# EAGLE board Driver (EAGLE 9.6.2)
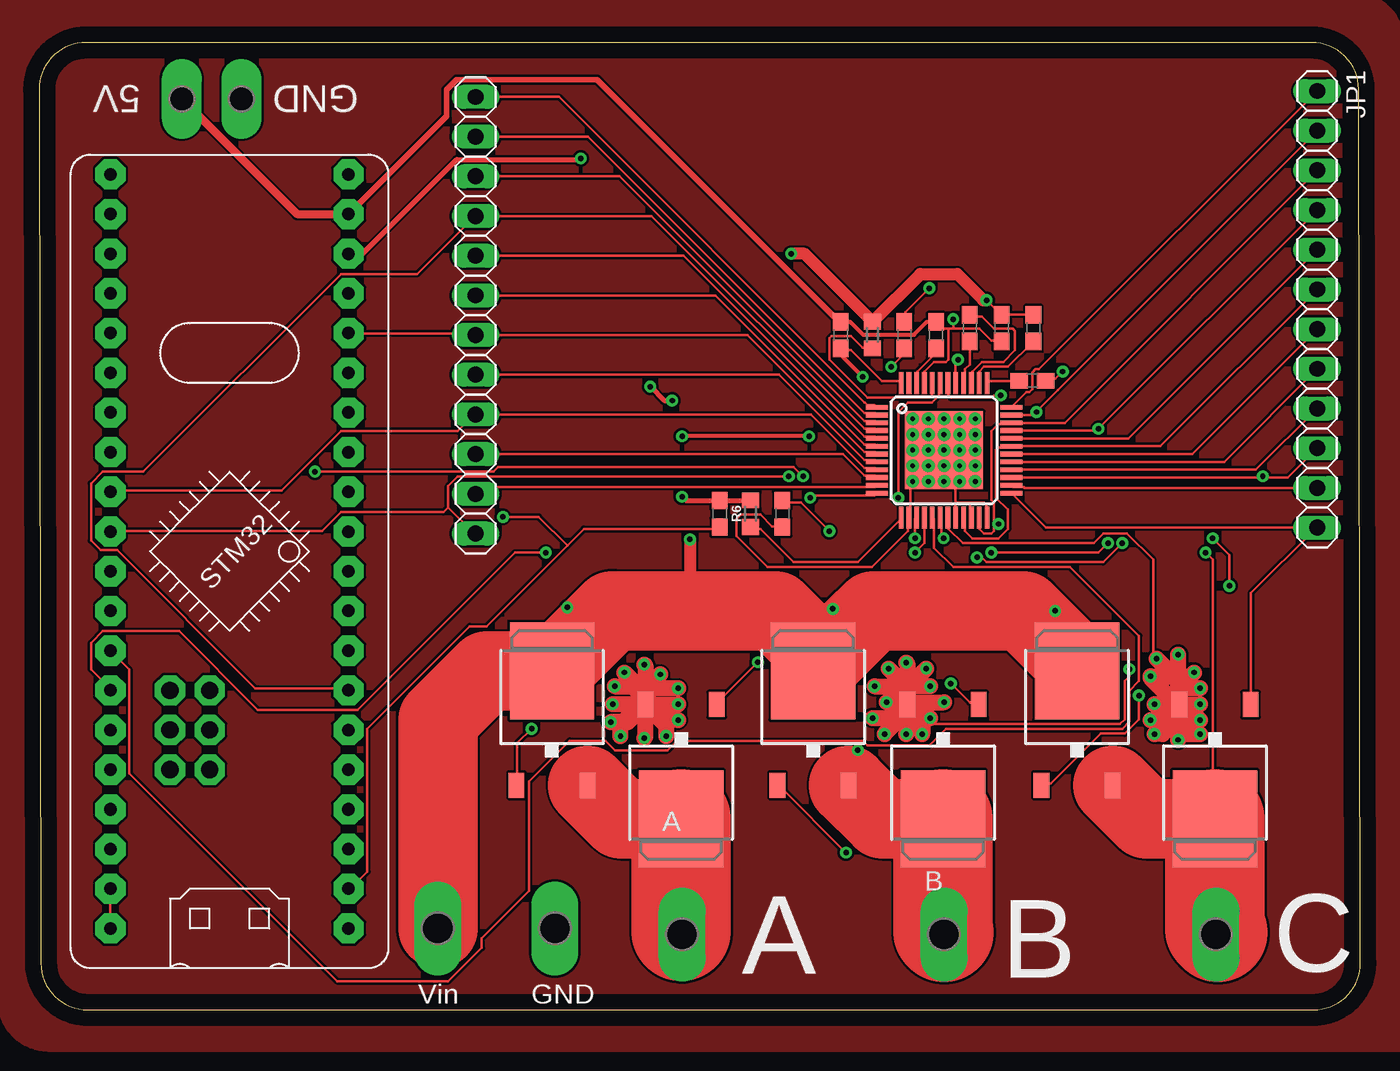
[diagram p0: board, top side]
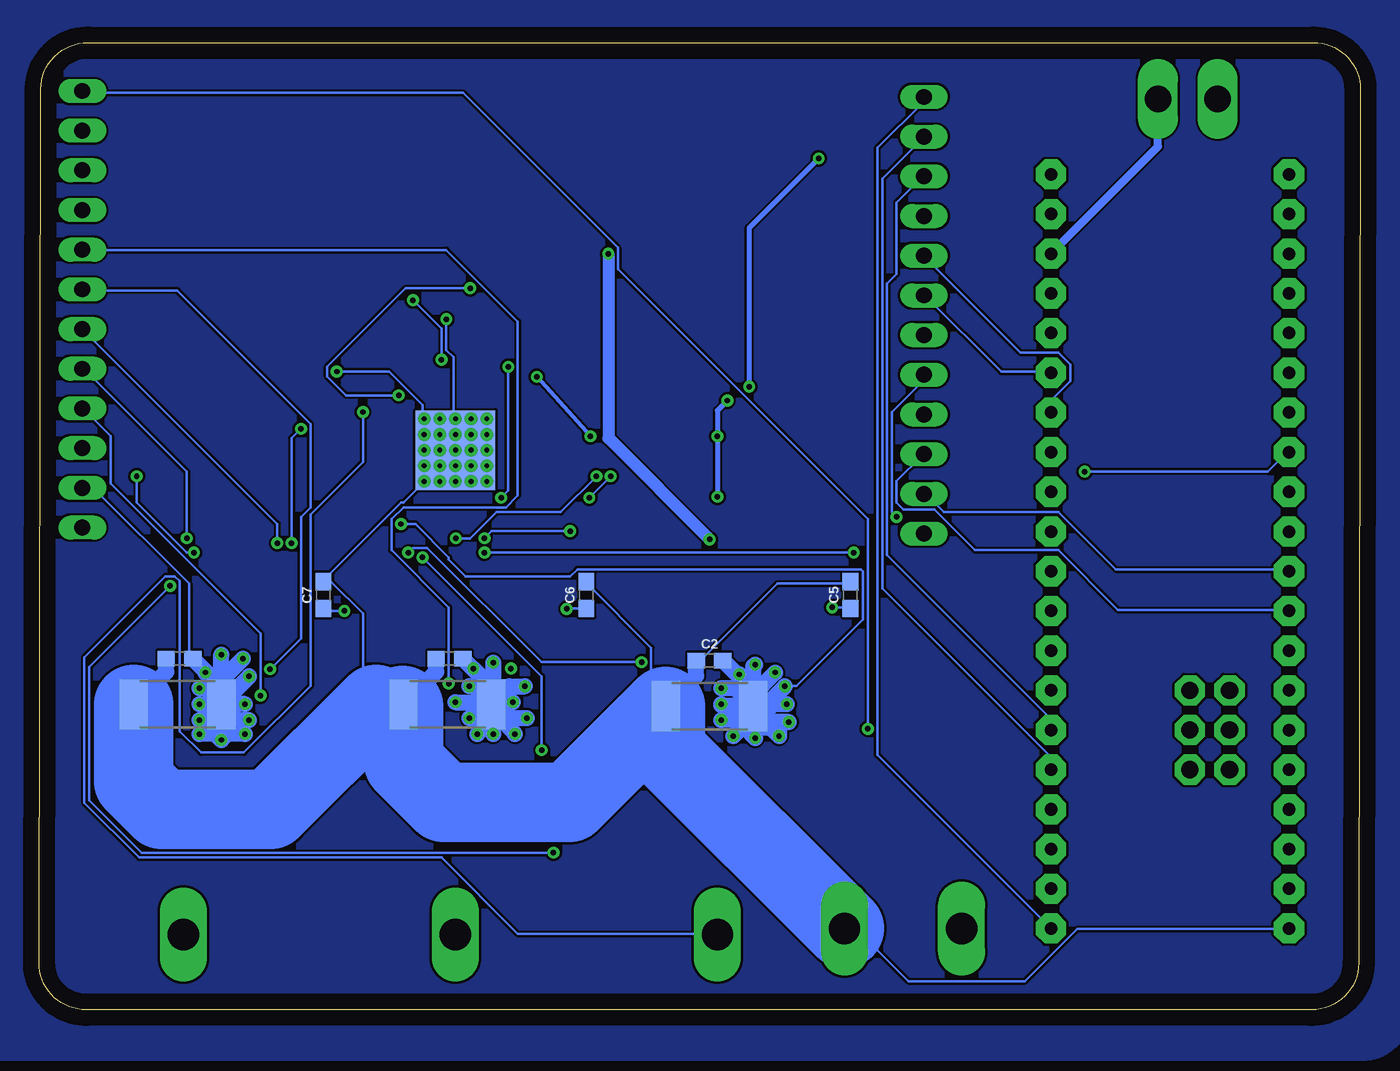
[diagram p1: board, bottom side, seen from below]

Size 84.55 x 61.9 mm. Coordinates in mm from the lower left corner, seen from the top.
Outline: 0,58.89 0.11,2.99 arc90 3.11,0 81.55,0 arc90 84.55,3.01 84.43,58.91 arc90 81.43,61.9 3,61.9 arc90 0,58.89
Copper layers (1*16): Top 0.035mm / dielectric 1.5mm / Bottom 0.035mm
Design rules "default": minimum track width 6mil, minimum drill 0.35mm, track to track 6mil, track to pad 6mil, pad to pad 6mil, via to via 6mil, smd to smd 6mil, copper to edge 40mil, drill to drill 6mil, minimum pad ring 10mil, minimum via ring 8mil, stop-mask expansion 4mil, vias tented up to drill 0mil, thermal gap 10mil

## Footprints (pad centres in the part's own frame; a part is rotated, then mirrored left to right if it is on the bottom)
P2-38-17 = drill 1.702 pad 2.121 long: TP-1 -1.905,0; TP-2 1.905,0
P1-20Y = drill 2.007 pad 2.54 long: TP 0,0
C0603 = smd 1.1 x 1: 1 -0.85,0; 2 0.85,0
0603 = smd 1.1 x 1: 1 -0.85,0; 2 0.85,0
1X12 = drill 1.016 long: 1 -13.97,0; 2 -11.43,0; 3 -8.89,0; 4 -6.35,0; 5 -3.81,0; 6 -1.27,0; 7 1.27,0; 8 3.81,0; 9 6.35,0; 10 8.89,0; 11 11.43,0; 12 13.97,0
R2512 = smd 1.8 x 3.2: 1 -2.8,0; 2 2.8,0
R0603 = smd 1 x 1.1: 1 -0.85,0; 2 0.85,0
BLUE_PILL_ADV = drill 0.8 pad 1.93 octagon: P$1 10.16,-30.48; P$2 10.16,-27.94; P$3 10.16,-25.4; P$4 10.16,-22.86; P$5 10.16,-20.32; P$6 10.16,-17.78; P$7 10.16,-15.24; P$8 10.16,-12.7; P$9 10.16,-10.16; P$10 10.16,-7.62; P$11 10.16,-5.08; P$12 10.16,-2.54; P$13 10.16,0; P$14 10.16,2.54; P$15 10.16,5.08; P$16 10.16,7.62; P$17 10.16,10.16; P$18 10.16,12.7; P$19 10.16,15.24; P$20 10.16,17.78; P$21 -5.08,-30.48; P$22 -5.08,-27.94; P$23 -5.08,-25.4; P$24 -5.08,-22.86; P$25 -5.08,-20.32; P$26 -5.08,-17.78; P$27 -5.08,-15.24; P$28 -5.08,-12.7; P$29 -5.08,-10.16; P$30 -5.08,-7.62; P$31 -5.08,-5.08; P$32 -5.08,-2.54; P$33 -5.08,0; P$34 -5.08,2.54; P$35 -5.08,5.08; P$36 -5.08,7.62; P$37 -5.08,10.16; P$38 -5.08,12.7; P$39 -5.08,15.24; P$40 -5.08,17.78 | drill 1.1 pad 1.93 octagon: P$42 -1.27,-20.32; P$43 -1.27,-17.78; P$44 -1.27,-15.24; P$45 1.27,-15.24; P$46 1.27,-17.78; P$47 1.27,-20.32
TO252 = smd 1 x 1.6: 1 -2.28,-4.8; 2 2.28,-4.8 | smd 5.4 x 6.2: 3 0,2.5
PFB_S-PQFP-G48 = smd 1.4 x 0.3: 1 -4.3,2.75; 2 -4.3,2.25; 3 -4.3,1.75; 4 -4.3,1.25; 5 -4.3,0.75; 6 -4.3,0.25; 7 -4.3,-0.25; 8 -4.3,-0.75; 9 -4.3,-1.25; 10 -4.3,-1.75; 11 -4.3,-2.25; 12 -4.3,-2.75; 25 4.3,-2.75; 26 4.3,-2.25; 27 4.3,-1.75; 28 4.3,-1.25; 29 4.3,-0.75; 30 4.3,-0.25; 31 4.3,0.25; 32 4.3,0.75; 33 4.3,1.25; 34 4.3,1.75; 35 4.3,2.25; 36 4.3,2.75 | smd 0.3 x 1.4: 13 -2.75,-4.3; 14 -2.25,-4.3; 15 -1.75,-4.3; 16 -1.25,-4.3; 17 -0.75,-4.3; 18 -0.25,-4.3; 19 0.25,-4.3; 20 0.75,-4.3; 21 1.25,-4.3; 22 1.75,-4.3; 23 2.25,-4.3; 24 2.75,-4.3; 37 2.75,4.3; 38 2.25,4.3; 39 1.75,4.3; 40 1.25,4.3; 41 0.75,4.3; 42 0.25,4.3; 43 -0.25,4.3; 44 -0.75,4.3; 45 -1.25,4.3; 46 -1.75,4.3; 47 -2.25,4.3; 48 -2.75,4.3 | smd 5 x 5: P$1 0,0 | drill 0.305: P$2 -2,2; P$3 -1,2; P$4 0,2; P$5 1,2; P$6 2,2; P$7 -2,1; P$8 -1,1; P$9 0,1; P$10 1,1; P$11 2,1; P$12 2,0; P$13 1,0; P$14 0,0; P$15 -1,0; P$16 -2,0; P$17 -2,-1; P$18 -1,-1; P$19 0,-1; P$20 1,-1; P$21 2,-1; P$22 2,-2; P$23 1,-2; P$24 0,-2; P$25 -1,-2; P$26 -2,-2 | smd 5.08 x 5.08 bottom: P$27 0,0

## Placement (x,y rotation side)
5V  TP2P2-38-17  [P2-38-17]  11.04,58.29 0 top
A  PTR1PAD1-20Y  [P1-20Y]  41.14,4.83 0 top
B  PTR1PAD1-20Y  [P1-20Y]  57.91,4.83 0 top
C  PTR1PAD1-20Y  [P1-20Y]  75.3,4.83 0 top
C1  1uF  [C0603]  47.56,31.75 270 top
C2  1nF  [0603]  41.65,22.35 0 bottom
C3  1nF  [0603]  58.29,22.48 0 bottom
C4  1nF  [0603]  75.56,22.48 0 bottom
C5  1.0uF  [0603]  32.63,26.54 90 bottom
C6  1.0uF  [0603]  49.52,26.54 90 bottom
C7  1.0uF  [0603]  66.35,26.54 90 bottom
C10  1uF  [C0603]  63.56,40.26 0 top
C11  2.2uF  [C0603]  63.62,43.62 270 top
C12  4.7uF  [C0603]  61.59,43.62 270 top
C13  47nF  [C0603]  59.56,43.62 270 top
C14  47nF  [C0603]  55.37,43.18 270 top
C15  1uF  [C0603]  57.4,43.18 90 top
C16  1uF  [C0603]  51.3,43.18 90 top
JP1  [1X12]  81.78,44.83 270 top
JP2  [1X12]  27.93,44.45 90 top
R1  [R2512]  41.65,19.43 0 bottom
R2  [R2512]  58.41,19.56 0 bottom
R3  10k  [R0603]  45.52,31.75 270 top
R4  100  [R0603]  53.33,43.18 90 top
R5  [R2512]  75.69,19.56 0 bottom
R6  10k  [0603]  43.55,31.75 270 top
TP1  PTR1PAD1-20Y  [P1-20Y]  25.52,5.21 0 top
TP2  PTR1PAD1-20Y  [P1-20Y]  33.01,5.21 0 top
U$1  [BLUE_PILL_ADV]  9.65,35.69 0 top
U$2  IRLR7843  [TO252]  32.82,19.18 0 top
U$3  DRV8305  [PFB_S-PQFP-G48]  57.91,35.81 0 top
U$4  IRLR7843  [TO252]  41.08,14.73 180 top
U$5  IRLR7843  [TO252]  49.52,19.18 0 top
U$6  IRLR7843  [TO252]  57.84,14.73 180 top
U$7  IRLR7843  [TO252]  66.41,19.18 0 top
U$8  IRLR7843  [TO252]  75.24,14.73 180 top

## Library data of the parts
5V A B C TP1 TP2 = testpad
C1 C10-C16 = rcl; SPICEPREFIX: C
C2-C4 = SparkFun-Capacitors; PROD_ID: CAP-07886
C5-C7 = SparkFun-Capacitors; PROD_ID: CAP-13930
JP1 JP2 = pinhead
R1-R5 = rcl; SPICEPREFIX: R
R6 = SparkFun-Resistors; PROD_ID: RES-00824
U$1 = BluePill
U$2-U$8 = BLDC project

## Nets
CP1H: C14.2 U$3.43
CP1L: C14.1 U$3.42
CP2H: C13.1 U$3.39
CP2L: C13.2 U$3.40
DVDD: C15.1 U$3.46
GH_A: JP1.1 U$2.1 U$3.36
GH_B: JP1.8 U$3.29 U$5.1
GH_C: JP1.9 U$3.28 U$7.1
GL_A: JP1.4 U$3.33 U$4.1
GL_B: JP1.5 U$3.32 U$6.1
GL_C: JP1.12 U$3.25 U$8.1
GND: 5V.TP-1 C1.2 C2.1 C3.1 C4.1 C5.2 C6.2 C7.2 C10.2 C12.2 C15.2 C16.2 R1.1 R2.1 R5.1 TP2.TP U$1.P$19 U$1.P$21 U$1.P$22 U$3.14 U$3.20 U$3.22 U$3.24 U$3.45 U$3.P$1 U$3.P$2 U$3.P$3 U$3.P$4 U$3.P$5 U$3.P$6 U$3.P$7 U$3.P$8 U$3.P$9 U$3.P$10 U$3.P$11 U$3.P$12 U$3.P$13 U$3.P$14 U$3.P$15 U$3.P$16 U$3.P$17 U$3.P$18 U$3.P$19 U$3.P$20 U$3.P$21 U$3.P$22 U$3.P$23 U$3.P$24 U$3.P$25 U$3.P$26 U$3.P$27
N$3: U$1.P$23
N$4: U$1.P$24
N$15: C1.1 U$3.15
N$40: U$1.P$20
PA0: U$1.P$36
PA1: U$1.P$35
PA2: U$1.P$34
PA3: U$1.P$33 U$3.18
PA4: JP2.4 U$1.P$32 U$3.9
PA5: JP2.1 U$1.P$31 U$3.12
PA6: JP2.2 U$1.P$30 U$3.11
PA7: JP2.3 U$1.P$29 U$3.10
PA8: JP2.11 U$1.P$5 U$3.2
PA9: JP2.10 U$1.P$6 U$3.3
PA10: JP2.9 U$1.P$7 U$3.4
PA11: U$1.P$8
PA12: U$1.P$9
PA15: U$1.P$10
PB0: U$1.P$28 U$3.17
PB1: U$1.P$27 U$3.16
PB3: U$1.P$11
PB4: U$1.P$12
PB5: U$1.P$13
PB6: JP2.8 U$1.P$14 U$3.5
PB7: JP2.7 U$1.P$15 U$3.6
PB8: JP2.6 U$1.P$16 U$3.7
PB9: U$1.P$17
PB10: U$1.P$26
PB11: U$1.P$25
PB12: JP2.12 U$1.P$1 U$3.1
PB13: JP2.5 R6.2 U$1.P$2 U$3.8
PB14: U$1.P$3
PB15: U$1.P$4
PC13: U$1.P$39
PC14: U$1.P$38
PC15: U$1.P$37
PWRGD: R3.2 U$3.13
SH_A: A.TP JP1.2 U$2.2 U$3.35 U$4.3
SH_B: B.TP JP1.7 U$3.30 U$5.2 U$6.3
SH_C: C.TP JP1.10 U$3.27 U$7.2 U$8.3
SN1: C2.2 JP1.3 R1.2 U$3.23 U$3.34 U$4.2
SN2: C3.2 JP1.6 R2.2 U$3.21 U$3.31 U$6.2
SN3: C4.2 JP1.11 R5.2 U$3.19 U$3.26 U$8.2
VCC: 5V.TP-2 C16.1 R3.1 R6.1 U$1.P$18 U$3.48
VCP_LSD: C10.1 U$3.37
VCPH: C11.2 U$3.38
VDRAIN: R4.1 U$3.44
VIN: C5.1 C6.1 C7.1 C11.1 C12.1 R4.2 TP1.TP U$2.3 U$3.41 U$5.3 U$7.3

## Tracks (layer width: path | path; a pad name or v marks a point on that pad's centre or on a via)
B
  pour Bottom: -3.05,65.53 -3.05,-0.05 arc90 -0.05,-3.05 87.75,-3.05 87.75,62.53 arc90 84.75,65.53
CP1H  (via drill 0.35)
  Top 0.152: v54.53,41.15 55.29,41.91 55.29,42.22 C14.2 | v54.98,32.77 54.98,38.25 55.59,38.86 57.12,38.86 57.58,39.32 57.58,40.08 U$3.43
  Bottom 0.152: v54.53,41.15 54.53,33.22 v54.98,32.77
CP1L  (via drill 0.35)
  Top 0.152: v56.97,46.18 55.44,44.65 55.44,44.04 C14.1 | v61.54,39.32 61.08,39.32 60.93,39.17 58.34,39.17 58.18,39.32 58.18,40.08 U$3.42
  Bottom 0.152: v56.97,46.18 61.08,46.18 66.11,41.15 66.11,40.54 64.89,39.32 v61.54,39.32
CP2H
  Top 0.152: C13.1 59.56,44.35 60.32,44.35 61.08,43.59 62.3,43.59 62.45,43.43 62.45,42.22 61.69,41.45 60.32,41.45 59.71,40.84 59.71,40.23 U$3.39
CP2L
  Top 0.152: C13.2 59.56,41.3 59.25,41 59.25,40.23 U$3.40
D
  pour Top: -2.42,61.09 -2.42,0.59 arc90 0.58,-2.41 87.12,-2.41 87.12,61.9 arc90 84.12,64.9 -2.42,64.9
DVDD
  Top 0.152: C15.1 57.27,42.22 57.27,41.91 56.2,40.84 56.2,40.23 U$3.46
GH_A  (via drill 0.35)
  Top 0.152: JP1.1 63.97,40.99 63.76,40.99 63.55,40.77 63.55,39.73 63.35,39.53 63.17,39.53 U$3.36 | v31.51,17.98 30.6,17.07 30.6,14.48 U$2.1
  Bottom 0.152: v31.51,17.98 31.51,31.39 47.52,47.4 47.52,48.77 57.42,58.67 81.65,58.67 JP1.1
GH_B  (via drill 0.35)
  Top 0.152: JP1.8 75.82,35.06 U$3.29 | v51.63,10.06 47.36,14.33 U$5.1 | v76.17,27.13 76.17,29.11 v75.1,30.18
  Bottom 0.152: v51.63,10.06 78,10.06 81.35,13.41 81.35,21.95 v76.17,27.13 | v75.1,30.18 75.1,34.44 81.65,41 JP1.8
GH_C  (via drill 0.35)
  Top 0.152: JP1.9 77.86,34.56 U$3.28 | v70.38,20.12 70.38,18.59 69.46,17.68 67.94,17.68 64.74,14.48 64.28,14.48 U$7.1
  Bottom 0.152: v70.38,20.12 70.38,24.08 79.98,33.68 79.98,36.73 81.65,38.41 JP1.9
GL_A  (via drill 0.35)
  Top 0.152: JP1.4 v67.79,37.19 67.66,37.06 U$3.33 | v45.99,22.25 43.4,19.66 U$4.1 | v60.93,29.26 67.79,29.26 v68.4,29.87
  Bottom 0.152: v45.99,22.25 52.39,22.25 59.71,29.57 60.62,29.57 v60.93,29.26 | v68.4,29.87 68.4,36.58 v67.79,37.19
GL_B  (via drill 0.35)
  Top 0.152: JP1.5 69.7,36.56 U$3.32 | v58.34,20.88 59.56,19.66 60.01,19.66 U$6.1
  Bottom 0.152: v58.34,20.88 58.34,25.76 61.99,29.41 61.99,31.39 61.23,32.16 54.68,32.16 53.92,32.92 53.92,44.04 58.49,48.62 81.65,48.62 JP1.5
GL_C
  Top 0.152: U$3.25 64.41,30.86 JP1.12 81.65,30.79 77.54,26.67 77.54,19.66 U$8.1
GND  (via drill 0.35)
  Top 0.152: 58.18,43.59 57.73,43.59 57.42,43.89 C15.2 | 58.18,43.59 58.49,43.59 | 58.49,43.59 60.17,43.59 60.93,42.82 61.54,42.82 C12.2 | 58.18,43.59 58.18,41.61 58.03,41.45 57.27,41.45 56.66,40.84 56.66,40.23 U$3.45 | 51.17,44.04 C16.2 | v65.5,40.84 65.04,40.39 64.43,40.39 C10.2 | C1.2 47.52,30.94 46.91,30.94 46.15,31.7 44.93,31.7 44.62,31.39 44.62,30.33 46.6,28.35 53.31,28.35 55.59,30.63 55.59,31.39 U$3.14 55.75,31.55 55.75,33.53 55.9,33.68 U$3.P$26 56.05,33.83 56.81,33.83 | 58.64,32.46 58.64,33.53 58.79,33.68 U$3.P$27 | 58.64,32.46 58.64,31.55 U$3.20 | 59.4,32.46 59.56,32.31 59.56,31.55 U$3.22 | 58.64,32.46 59.4,32.46 | 59.4,32.46 60.47,32.46 60.62,32.31 60.62,31.55 U$3.24 | 56.81,33.83 U$3.P$25 | 56.81,33.83 U$3.P$27 | U$3.P$24 58.03,33.83 58.49,34.29 U$3.P$27 | U$3.P$27 58.79,33.83 U$3.P$23 58.95,33.83 59.86,33.83 U$3.P$22 | 56.81,34.9 56.05,34.9 U$3.P$17 | 56.81,34.9 U$3.P$18 | 56.81,34.9 U$3.P$27 | U$3.P$19 58.03,34.9 58.18,34.9 U$3.P$27 | U$3.P$27 58.49,34.44 58.79,34.75 U$3.P$20 58.95,34.9 59.86,34.9 U$3.P$21 | U$3.P$27 U$3.P$15 U$3.P$16 | 57.42,36.27 U$3.P$27 | U$3.P$3 56.81,37.8 56.05,37.8 U$3.P$2 55.9,37.8 55.9,36.88 U$3.P$27 | 58.79,37.8 58.03,37.8 | 58.79,37.8 U$3.P$5 | 58.79,37.8 U$3.P$27 | U$3.P$13 U$3.P$27 | U$3.P$12 U$3.P$27 | U$1.P$21 4.54,5.33 4.54,7.62 U$1.P$22 | v58.49,44.2 58.49,43.59 | U$3.P$27 56.97,36.73 U$3.P$8 | U$3.P$7 56.05,36.88 56.81,36.88 U$3.P$27 | U$3.P$9 58.03,36.73 58.18,36.58 U$3.P$27 | 58.03,37.8 U$3.P$4 | 58.03,37.8 U$3.P$27
  Top 0.254: C15.2 56.81,44.03 55.98,43.2 52.72,43.2 51.89,44.03 C16.2
  Top 0.356: 51.17,44.04 35.71,59.51 26.72,59.51 26.08,58.87 26.08,57.2 U$1.P$19
  Top 0.508: 5V.TP-1 16.5,50.93 U$1.P$19
  Bottom 0.152: v65.5,40.84 62.15,40.84 60.01,38.71 60.01,37.95 | U$3.P$13 58.79,35.81 58.34,36.27 U$3.P$27 | U$3.P$10 58.95,36.88 U$3.P$27 | U$3.P$11 59.86,36.88 59.4,37.34 U$3.P$27 | 59.86,37.8 U$3.P$6 60.01,37.95 | C5.2 32.73,27.28 37.31,27.28 42.03,22.55 C2.1 | C6.2 49.5,27.28 45.38,23.16 45.38,21.79 R1.1 | U$1.P$21 4.69,5.18 18.1,5.18 21.46,1.83 28.92,1.83 30.91,3.81 TP2.TP | U$3.P$22 60.01,33.68 61.23,32.46 61.39,32.46 66.41,27.43 C7.2 65.87,27.39 63.82,25.35 63.82,21.95 62.99,19.56 61.23,19.66 | v58.49,44.2 58.49,42.22 58.03,41.76 58.03,37.95 U$3.P$27 | 60.01,37.95 U$3.P$27 | 61.23,19.66 R2.1 | 61.23,19.66 61.21,19.41
  Bottom 1.016: R1.1 42.5,21.38 C2.1 | R5.1 76.41,21.64 C4.1 | R2.1 59.14,21.64 C3.1
  Bottom 5.08: TP2.TP 44.45,16.64 R1.1 50.61,13.27 58.67,13.27 61.21,15.82 61.21,19.41 61.29,19.48 | R5.1 78.49,14.61 76.7,12.83 69.72,12.83 62.99,19.56
N$15  (via drill 0.35)
  Top 0.152: v50.56,30.63 48.74,32.46 47.67,32.46 C1.1 | v56.05,30.18 56.05,31.39 U$3.15
  Bottom 0.152: v50.56,30.63 55.59,30.63 v56.05,30.18
PA3  (via drill 0.35)
  Top 0.152: v57.88,30.18 57.73,30.33 57.73,31.39 U$3.18 | v48.89,34.14 48.28,34.75 29.38,34.75 29.08,34.44 v17.65,34.44
  Bottom 0.152: v57.88,30.18 56.97,30.18 55.29,31.85 51.17,31.85 v48.89,34.14 | v17.65,34.44 5.91,34.44 4.69,35.66 U$1.P$33
PA4
  Top 0.152: U$3.9 53.48,34.69 52.81,34.69 49.4,38.1 JP2.4 27.86,38.1 26.79,37.03 19.32,37.03 15.51,33.22 4.69,33.22 U$1.P$32
PA5  (via drill 0.35)
  Top 0.152: v49.35,32.77 49.5,32.92 53.46,32.92 U$3.12 | v47.97,34.14 26.79,34.14 26.18,33.53 26.18,32.16 | 26.18,32.16 27.86,30.48 JP2.1 | 26.18,32.16 25.88,31.85 19.32,31.85 18.1,30.63 4.69,30.63 U$1.P$31
  Bottom 0.152: v47.97,34.14 v49.35,32.77
PA6
  Top 0.152: U$3.11 53.48,33.44 28.36,33.44 JP2.2
  Bottom 0.152: U$1.P$30 4.69,28.19 15.67,28.19 19.32,31.85 26.64,31.85 27.86,33.07 JP2.2
PA7
  Top 0.152: U$3.10 53.48,34.19 52.81,34.19 51.44,35.56 JP2.3
  Bottom 0.152: U$1.P$29 4.69,25.6 15.51,25.6 19.32,29.41 24.66,29.41 27.25,32 29.23,32 29.69,32.46 29.69,33.83 28.01,35.51 JP2.3
PA8
  Top 0.152: U$3.2 53.48,38.19 52.81,38.19 35.12,55.88 JP2.11
  Bottom 0.152: U$1.P$5 19.93,15.39 19.93,16.31 30.6,26.98 30.6,53.19 28.01,55.78 JP2.11
PA9
  Top 0.152: U$3.3 53.48,37.69 52.81,37.69 37.16,53.34 JP2.10
  Bottom 0.152: U$1.P$6 19.93,17.98 19.93,18.75 30.3,29.11 30.3,46.48 29.69,47.09 29.69,51.66 28.01,53.34 JP2.10
PA10
  Top 0.152: U$3.4 53.48,37.19 52.81,37.19 39.2,50.8 JP2.9 27.86,50.75 24.2,47.09 19.32,47.09 6.67,34.44 4.08,34.44 3.32,33.68 3.32,30.02 3.93,29.41 5,29.41 13.84,20.57 19.78,20.57 U$1.P$7
PB0
  Top 0.152: U$1.P$28 5.76,21.79 5.76,15.14 19.07,1.83 26.18,1.83 28.31,3.96 28.31,4.57 31.36,7.62 31.36,14.63 33.95,17.22 36.24,17.22 36.85,16.61 40.2,16.61 40.81,17.22 52.7,17.22 53,16.92 56.97,16.92 58.03,17.98 69.31,17.98 69.77,18.44 69.77,20.42 70.38,21.03 70.38,23.93 65.96,28.35 58.49,28.35 57.27,29.57 57.27,31.39 U$3.17
PB1  (via drill 0.35)
  Top 0.152: v56.05,29.26 56.66,29.87 56.66,31.39 U$3.16 | v32.43,29.26 30.45,29.26 20.39,19.2 13.99,19.2 8.96,24.23 4.08,24.23 3.32,23.47 3.32,21.79 4.54,20.57 U$1.P$27
  Bottom 0.152: v32.43,29.26 v56.05,29.26
PB6
  Top 0.152: U$3.5 53.48,36.69 52.81,36.69 41.24,48.26 JP2.8
  Bottom 0.152: U$1.P$14 19.78,38.25 19.78,39.01 18.56,40.23 18.56,41.3 19.32,42.06 21.76,42.06 27.86,48.16 JP2.8
PB7
  Top 0.152: U$3.6 53.48,36.19 52.81,36.19 43.28,45.72 JP2.7
  Bottom 0.152: U$1.P$15 19.93,40.84 22.98,40.84 27.86,45.72 JP2.7
PB8
  Top 0.152: U$3.7 53.48,35.69 52.81,35.69 45.32,43.18 JP2.6 27.86,43.28 19.93,43.28 U$1.P$16
PB12
  Top 0.152: JP2.12 33.27,58.42 52.83,38.86 52.85,38.86 53,38.71 53.46,38.71 U$3.1
  Bottom 0.152: JP2.12 28.01,58.37 28.01,58.06 30.91,55.17 30.91,16.31 U$1.P$1
PB13  (via drill 0.35)
  Top 0.152: U$3.8 53.48,35.19 52.81,35.19 47.36,40.64 JP2.5 | 33.8,29.72 28.62,24.54 27.55,24.54 21,17.98 21,8.84 19.93,7.77 U$1.P$2 | 33.8,29.72 34.87,30.79 43.55,30.79 R6.2 | v29.69,31.55 31.97,31.55 33.8,29.72
  Bottom 0.152: v29.69,31.55 29.99,31.85 29.99,38.25 28.01,40.23 28.01,40.54 JP2.5
PWRGD
  Top 0.152: R3.2 45.54,30.79 46.15,30.79 48.28,28.65 52.39,28.65 55.14,31.39 U$3.13
SH_A  (via drill 0.35)
  Top 0.152: JP1.2 65.19,39.66 63.8,38.28 | 63.8,38.28 63.59,38.06 U$3.35 | A.TP 41.27,4.88 41.08,5.02 | v63.82,38.25 63.8,38.28
  Top 5.08: U$2.2 37.25,12.23 U$4.3
  Top 6.35: U$4.3 41.08,5.02
  Bottom 0.152: v63.82,38.25 63.82,35.05 67.18,31.7 67.18,20.73 71.44,16.46 74.19,16.46 75.56,17.83 75.56,27.43 75.86,27.74 76.47,27.74 81.65,22.55 81.65,13.26 78.15,9.75 58.79,9.75 53.92,4.88 41.27,4.88 A.TP
SH_B  (via drill 0.35)
  Top 0.152: JP1.7 73.78,35.56 U$3.30 | B.TP 58.03,4.88 57.91,4.95 | v60.01,28.96 60.32,28.96 60.62,28.65 68.09,28.65 v69.31,29.87 | v52.39,16.61 U$5.2
  Top 5.08: U$5.2 53.95,12.23 U$6.3
  Top 6.35: U$6.3 57.84,5.02 57.91,4.95
  Bottom 0.152: v52.39,16.61 52.39,21.34 v60.01,28.96 | v69.31,29.87 69.31,31.09 JP1.7
SH_C  (via drill 0.35)
  Top 0.152: JP1.10 79.9,34.06 78.3,34.06 | 78.3,34.06 U$3.27 | C.TP 75.41,4.88 75.43,4.95 | v74.64,29.26 75.1,28.8 75.1,15.39 U$8.3 | v78.3,34.14 78.3,34.06
  Top 5.08: U$7.2 70.84,12.23 U$8.3
  Top 6.35: U$8.3 75.24,5.14 75.43,4.95
  Bottom 0.152: v74.64,29.26 75.1,29.26 78.3,32.46 v78.3,34.14
SN1  (via drill 0.35)
  Top 0.152: JP1.3 65.62,37.56 U$3.34 62.15,37.49 61.39,37.49 60.93,37.03 60.93,32.61 61.08,32.46 61.08,31.09 | 61.08,31.09 61.08,30.63 60.93,30.48 60.47,30.48 60.17,30.79 60.17,31.39 U$3.23 | v61.39,31.09 61.08,31.09
  Top 1.016: U$4.2 40.86,19.53 v40.89,19.56 | v40.89,18.54 39.79,18.54 U$4.2 | U$4.2 38.8,17.47 v38.73,17.4 | v40.89,20.57 39.24,20.57 38.8,20.14 | 38.8,20.14 38.8,19.87 | U$4.2 38.77,19.56 v36.7,19.56 | v36.82,20.7 37.97,20.7 38.8,19.87 | U$4.2 37.68,18.41 v36.57,18.41 | v38.73,22.1 38.8,22.03 38.8,20.52 | v37.46,21.59 38.8,20.25 | 38.8,20.25 38.8,20.14 | U$4.2 38.8,19.87 | 38.8,20.25 38.8,20.52 | 38.8,20.52 v39.74,21.46 | v37.2,17.53 37.2,18.28 38.8,19.87 | U$4.2 40.13,18.2 v40.13,17.53
  Bottom 0.152: v61.39,31.09 60.47,31.09 58.34,28.96 58.34,28.8 57.27,27.74 50.56,27.74 50.11,28.19 31.97,28.19 31.82,28.04 31.82,24.99 36.09,20.73 36.79,20.73 v36.82,20.7
  Bottom 0.254: 38.79,19.49 R1.2
  Bottom 1.016: v40.89,19.56 40.89,19.49 38.79,19.49 | R1.2 39.23,19.05 | 39.23,19.05 39.74,18.54 v40.89,18.54 | R1.2 38.85,19.04 38.47,18.67 | 38.47,18.67 38.47,19.06 R1.2 | R1.2 38.85,18.03 | v38.73,17.4 39.36,18.03 38.85,18.03 | R1.2 39.99,20.57 v40.89,20.57 | v36.7,19.56 37.59,19.56 38.47,18.67 | R1.2 38.09,19.43 v36.82,20.7 | v36.57,18.41 37.83,18.41 R1.2 | R1.2 38.85,21.98 v38.73,22.1 | R1.2 38.85,20.2 v37.46,21.59 | v39.74,21.46 38.85,20.57 R1.2 | R1.2 37.2,17.79 v37.2,17.53 37.71,18.03 38.85,18.03 | v40.13,17.53 39.23,18.42 39.23,19.05 | R1.2 38.85,20.4 C2.2
SN2  (via drill 0.35)
  Top 0.152: JP1.6 71.74,36.06 U$3.31 62.15,35.97 61.39,35.97 61.23,35.81 61.23,32.77 61.99,32 61.99,30.79 61.39,30.18 59.71,30.18 59.25,30.63 59.25,31.39 U$3.21 | v69.77,21.79 69.77,21.34 69.46,21.03 69.46,18.59 69.16,18.29 57.27,18.29 v57.02,18.67
  Top 1.016: 55.56,20.63 55.56,20.7 | 55.56,20.7 55.56,22.16 v55.49,22.23 | v57.02,20.7 55.62,20.7 | U$6.2 55.71,19.68 v57.91,19.68 | U$6.2 56.42,18.67 | 56.42,18.67 v57.02,18.67 | v53.46,20.7 55.56,20.7 | U$6.2 55.41,19.68 v54.22,19.68 | v53.33,18.67 56.42,18.67 | U$6.2 55.56,19.12 | 55.56,19.12 55.56,17.72 v55.49,17.65 | v54.1,17.65 55.56,19.12 | U$6.2 56.51,18.59 v56.51,17.65 | v54.35,21.84 55.56,20.63 | 55.56,20.63 U$6.2 | 55.56,20.7 55.62,20.7 | 55.62,20.7 v56.76,21.84
  Bottom 0.152: v69.77,21.79 67.79,23.77 67.79,31.55 67.18,32.16 67.18,37.49 75.71,46.02 81.65,46.02 JP1.6
  Bottom 1.016: v55.49,22.23 55.49,19.44 | 55.74,19.68 56.76,20.7 v57.02,20.7 | v57.91,19.68 55.74,19.68 | 55.74,19.68 R2.2 | R2.2 | v57.02,18.67 56.5,18.67 R2.2 | R2.2 54.47,20.7 v53.46,20.7 | v54.22,19.68 55.5,19.68 R2.2 | R2.2 54.72,18.67 v53.33,18.67 | v55.49,17.65 55.49,19.44 | 55.49,19.44 R2.2 | R2.2 55.61,19.17 v54.1,17.65 | v56.51,17.65 55.61,18.55 R2.2 | R2.2 55.61,20.58 55.56,20.64 v56.76,21.84 | R2.2 55.61,20.66 C3.2
SN3  (via drill 0.35)
  Top 0.152: JP1.11 63.04,33.4 63,33.44 62.33,33.44 U$3.26 | U$3.19 58.18,31.39 58.18,30.79 59.1,29.87 67.48,29.87 68.09,30.48 69.61,30.48 71.29,28.8 71.29,22.7 v71.49,22.48
  Top 1.016: U$8.2 72.89,19.6 72.89,19.94 | 72.89,21.08 v72.89,22.73 | v74.29,20.57 72.89,20.57 | U$8.2 72.99,19.56 v74.29,19.56 | 72.89,19.94 v74.29,18.54 73.65,18.54 72.89,17.78 | v72.89,17.27 72.89,17.78 | 72.89,19.46 72.89,18.41 | 72.89,18.41 72.89,17.78 | 72.89,19.46 U$8.2 | 72.89,17.78 73.02,17.65 v74.29,17.65 | 72.89,19.46 71.11,21.24 v71.11,21.34 73.65,21.34 | U$8.2 71.39,19.53 v71.37,19.56 | v71.11,18.54 72.76,18.54 | 72.76,18.54 72.89,18.41 | 72.76,18.54 71.88,17.65 v71.37,17.65 | v71.49,22.48 72.89,21.08 | 72.89,19.94 72.89,20.57 | 72.89,20.57 72.89,21.08 | 72.89,20.57 73.65,21.34 | 73.65,21.34 v73.91,21.59
  Bottom 0.152: C4.2 74.95,22.86 74.95,27.28 81.04,33.38 81.65,33.38 JP1.11
  Bottom 1.016: R5.2 72.89,20.57 | 72.89,20.57 v72.89,22.73 | R5.2 | R5.2 73.9,20.57 v74.29,20.57 | v74.29,19.56 R5.2 | R5.2 73.9,18.54 v74.29,18.54 | R5.2 72.89,18.92 | 72.89,18.92 v72.89,17.28 | v72.89,17.28 v72.89,17.27 73.27,17.65 v74.29,17.65 73.02,18.92 72.89,18.92 | R5.2 v71.11,21.33 v71.11,21.34 | v71.37,19.56 R5.2 | R5.2 71.87,18.54 v71.11,18.54 | v71.37,17.65 72.51,17.65 v72.89,17.28 | R5.2 72.89,21.09 v71.49,22.48 | v73.91,21.59 72.89,20.57 | R5.2 72.89,20.66 C4.2
VCC  (via drill 0.35)
  Top 0.152: C16.1 51.33,42.22 51.94,42.22 53.92,40.23 55.14,40.23 U$3.48
  Top 0.254: C16.1 51.3,41.91 v52.7,40.51 | v49.27,36.7 v41.14,36.7
  Top 0.305: v34.66,54.48 34.59,54.41 26.73,54.41 20.71,48.39 U$1.P$18 | v39.11,39.88 40,38.99 v40.51,38.99 | v41.14,32.84 41.38,32.6 R6.1 R3.1
  Bottom 0.254: v52.7,40.51 v49.27,36.7
  Bottom 0.305: v34.66,54.48 39.11,50.04 v39.11,39.88 | v40.51,38.99 41.14,38.35 v41.14,36.7 v41.14,32.84
  Bottom 0.508: U$1.P$18 12.95,55.24 5V.TP-2
VCP_LSD
  Top 0.152: C10.1 62.6,40.23 60.78,40.23 U$3.37
VCPH
  Top 0.152: C11.2 63.52,42.67 61.99,41.15 60.47,41.15 60.17,40.84 60.17,40.23 U$3.38
VDRAIN
  Top 0.152: R4.1 53.31,42.37 52.7,42.37 51.94,43.13 50.72,43.13 50.56,42.98 50.56,41.61 53,39.17 56.97,39.17 57.12,39.32 57.12,40.08 U$3.44
VIN  (via drill 0.35)
  Top 0.152: v33.8,25.76 35.35,24.21 | 51.3,25.4 51.05,25.4 v50.79,25.65 50.87,25.76 52.24,24.39 | 65.14,25.02 65.14,25.4 v65.02,25.53 65.04,25.6 62.99,25.53 | C11.1 63.52,44.5 61.69,44.5 C12.1 61.54,44.5 v60.62,45.41 | v58.79,41.61 58.64,41.45 58.64,40.23 U$3.41
  Top 0.762: v48.13,48.39 48.98,48.39 R4.2 56.39,47.09 58.75,47.09 60.42,45.41 v60.62,45.41 | v41.65,30.1 41.65,25.65 41.52,25.53
  Top 5.08: U$7.3 66.41,22.1 62.99,25.53 53.37,25.53 52.24,24.39 U$5.3 49.52,23.11 47.11,25.53 41.52,25.53 36.67,25.53 35.35,24.21 U$2.3 28.66,21.68 25.52,18.54 TP1.TP
  Bottom 0.152: v33.8,25.76 32.73,25.76 C5.1 | C6.1 50.75,25.69 v50.79,25.65 | C7.1 66.18,25.53 v65.02,25.53 | v58.79,41.61 58.79,43.59 v60.62,45.41
  Bottom 0.762: v48.13,48.39 48.13,36.58 v41.65,30.1

## Text on the board
tPlace: C | B
tNames: 5V | GND | A | Vin | GND